# Altium PCB fm_transmitter.PcbDoc
Units mm, origin at the board's own origin, x right, y up, seen from the top; angles counter-clockwise.
Board outline 60 x 35 mm, 2 copper layers (Top Layer (Signal), Bottom Layer (GND)), stack 1.571 mm thick; 33 components, 19 nets, 80 pads, 119 vias.
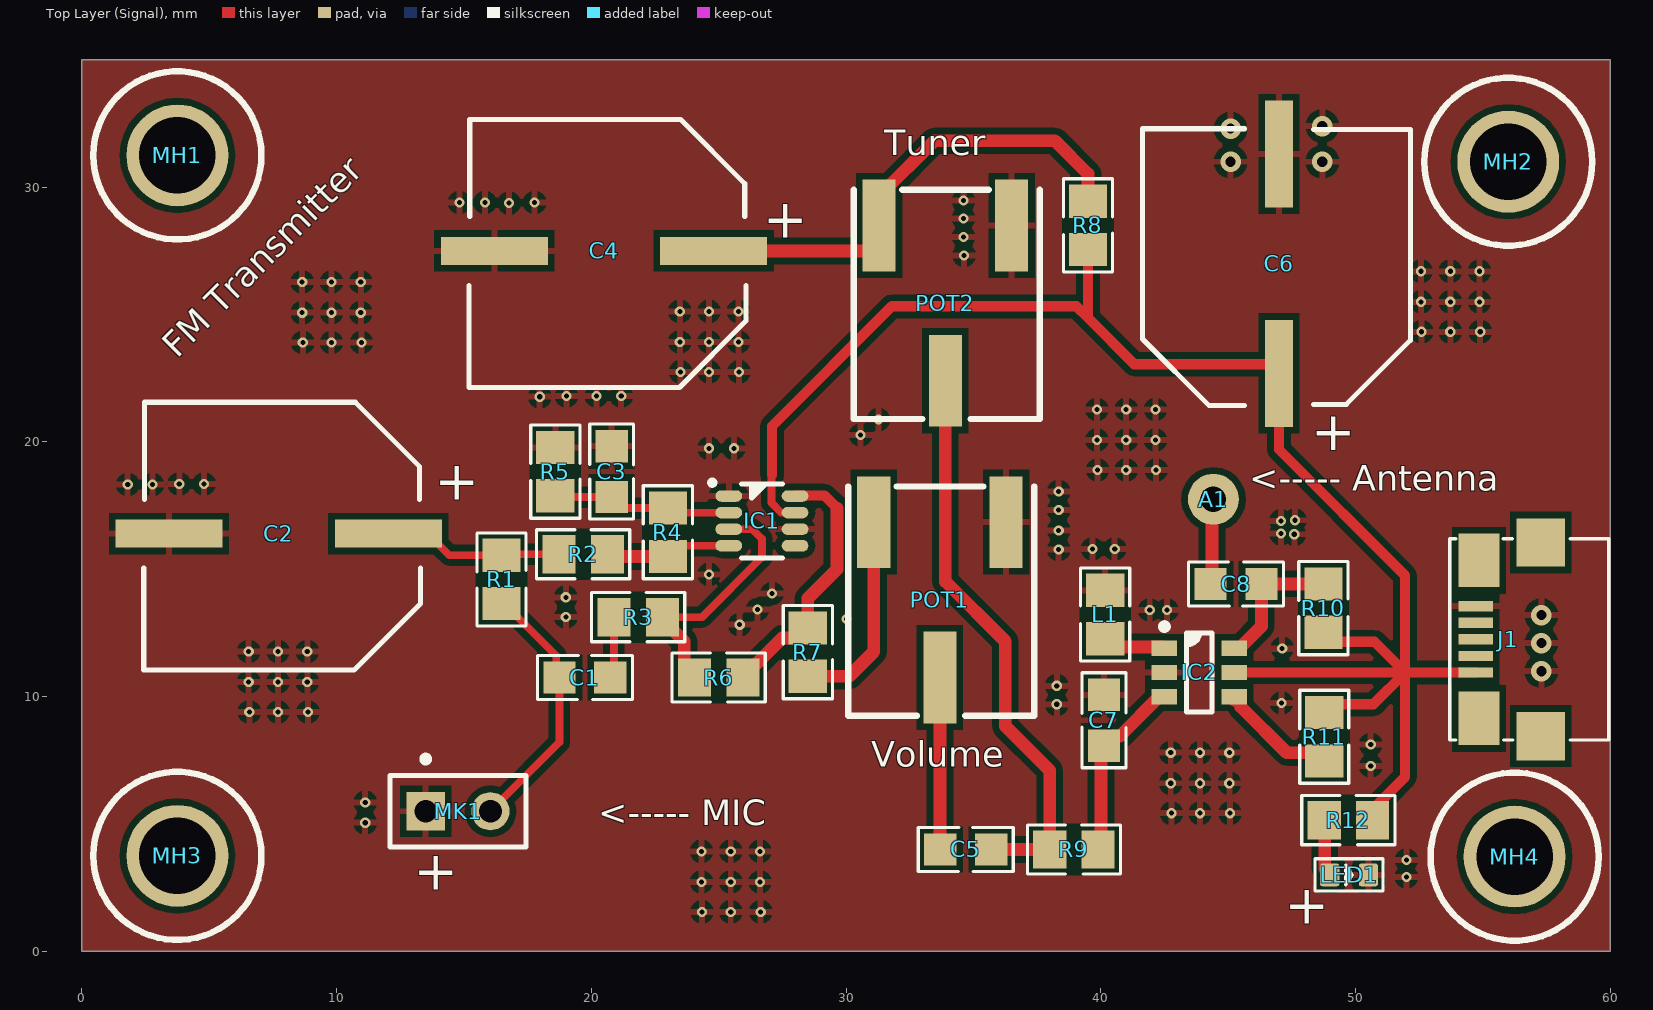
[diagram p0: Top Layer (Signal) view]
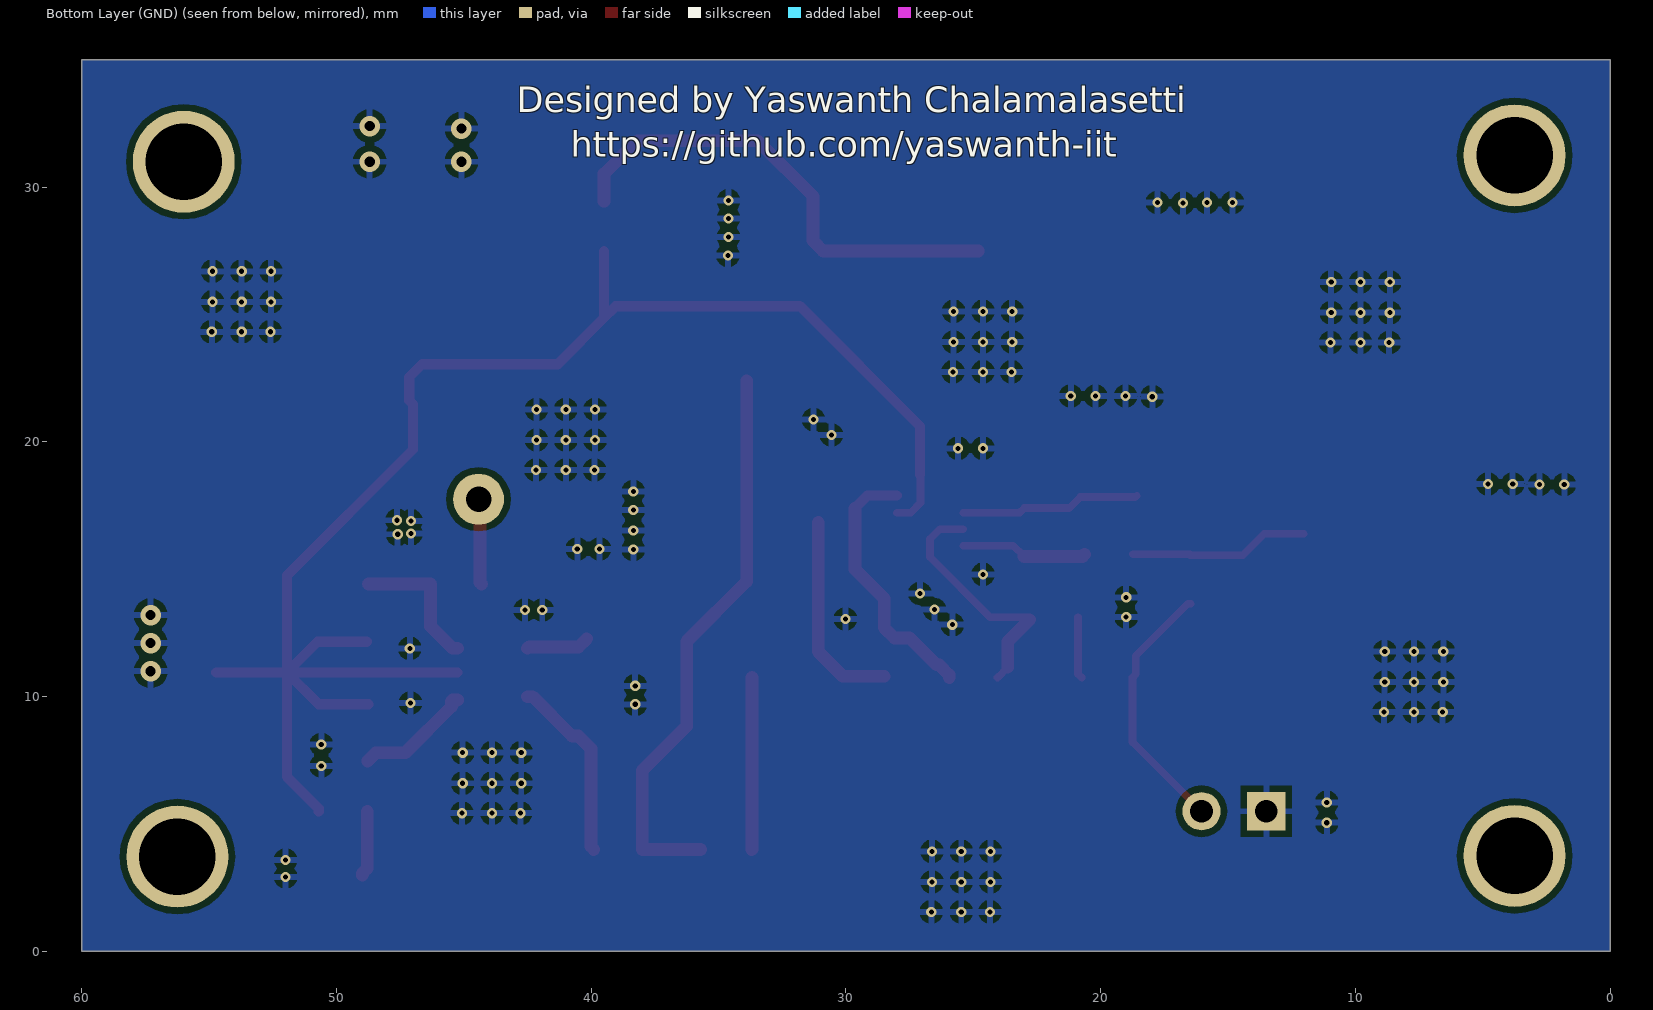
[diagram p1: Bottom Layer (GND) view, seen from below]
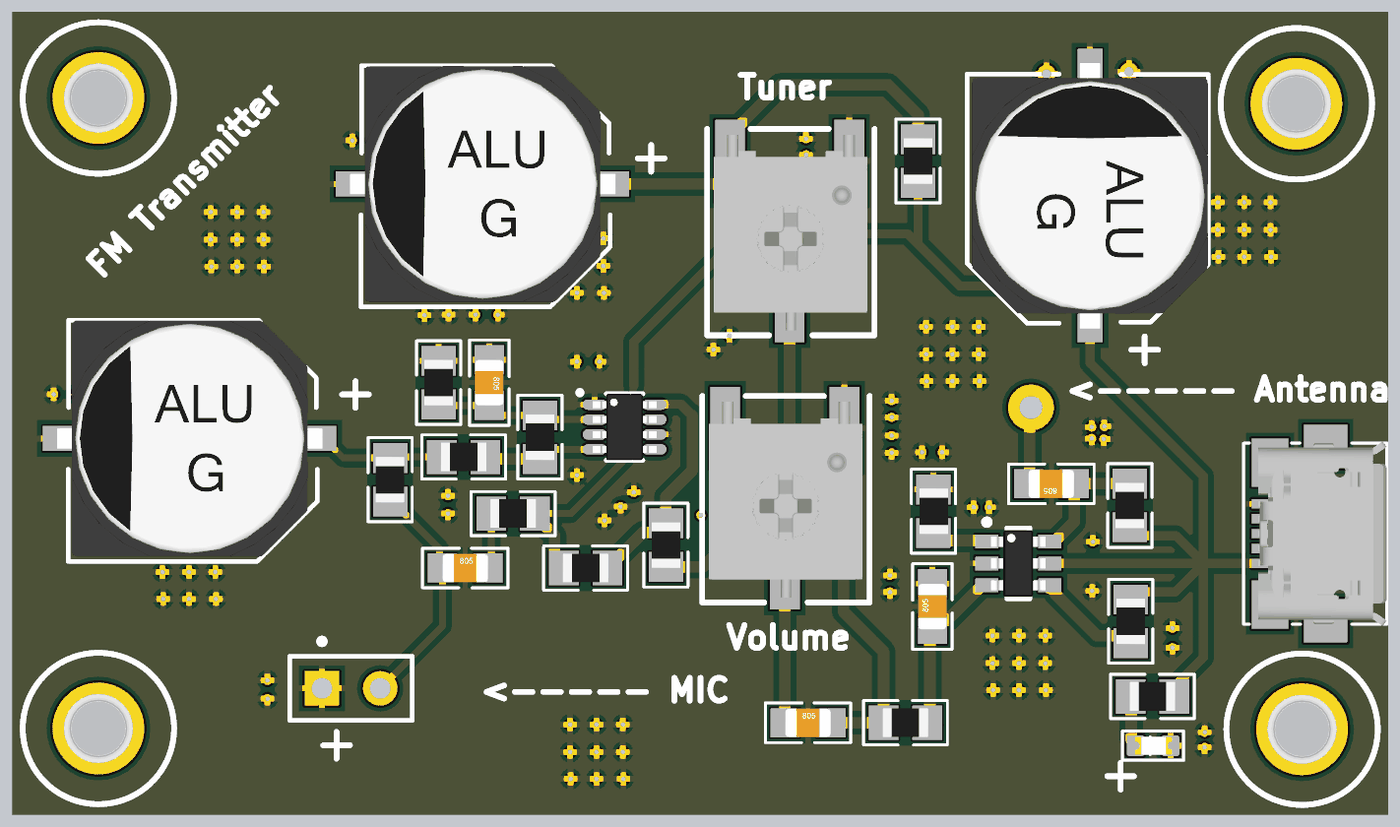
[diagram p2: 3D render of the assembled board from above, using the file's embedded part models]

## Layer stack, top to bottom
Top Solder: solder mask 0.0102, Solder Resist, Dk 3.5
Top Layer (Signal): signal copper 0.0356
Dielectric 1: core 1.5, Core-009, Dk 4.5
Bottom Layer (GND): signal copper 0.0356
Bottom Solder: solder mask 0.0102, Solder Resist, Dk 3.5

## Board outline
0,0 60,0 60,35 0,35

## Design rules (kind name [scope] priority, off if disabled: settings)
Clearance [All] p1: gap=0.254 ignorepadtopadclearanceinfootprint=TRUE except(0: Arc-Hole Track-Hole SMDPad-Hole THPad-Hole Via-Hole Fill-Hole Poly-Hole Region-Hole Text-Hole; 0.25: Arc-SMDPad Track-SMDPad)
PlaneConnect [All] p1: planeconnectstyle=Direct reliefexpansion=0.508 reliefentries=4 reliefconductorwidth=0.254 reliefairgap=0.254
PolygonConnect [All] p1: connectstyle=Relief reliefconductorwidth=0.254 reliefentries=4 polygonreliefangle="90 Angle" airgapwidth=0.254
RoutingVias [All] p1: holewidth=0.711 width=1.27 viastyle="Through Hole" minholewidth=0.711 minwidth=1.27 maxholewidth=0.711 maxwidth=1.27
SolderMaskExpansion [All] p1: expansion=0.102
Width [All] p1: maxlimit=1 minlimit=0.254 preferedwidth=0.254 minimp=50.000000 maximp=50.000000 favimp=50.000000
29 further rules are at their usual default settings.

## Components (designator, comment, footprint, x,y, rotation, side; value= is the part's Value field where it differs from the comment)
A1 "Wire Antenna" "TEST POINT_78" 44.425,17.75 r180 top
C1 "100nF" CAP_0805 19.75,10.75 r0 top
C2 "10uF" ACAP_P339_D393_H531_RAD 7.725,16.4 r180 top
C3 "47nF" CAP_0805 20.799,18.836 r270 top
C4 "10uF" ACAP_P339_D393_H531_RAD 20.5,27.499 r180 top
C5 "470nF" CAP_0805 34.7,4 r0 top
C6 "1uF" ACAP_P339_D393_H531_RAD 47,27 r90 top
C7 "2.2nF" CAP_0805 40.127,9.071 r90 top
C8 "2.2nF" CAP_0805 45.313,14.422 r180 top
IC1 "MAX4467" "TI SOT-23-8 DDF" 26.7,16.9 r270 top
IC2 "MAX2606" "MAXIM SOT-23-6" 43.875,10.95 r0 top
J1 "USB MICRO-B" CON_10118192-0001LF_SMD 56,12.25 r90 top
L1 "390nH" IND_0805 40.175,13.225 r90 top
LED1 "GREEN" LED-0603 49.75,3 r0 top
MH1 "Mounting Hole" MOUNTING 3.75,31.25 r0 top
MH2 "Mounting Hole" MOUNTING 56,31 r0 top
MH3 "Mounting Hole" MOUNTING 3.75,3.75 r0 top
MH4 "Mounting Hole" MOUNTING 56.25,3.717 r0 top
MK1 "Microphone" PIN2 13.5,5.5 r0 top
POT1 "10k ohm" POT_3361P_SMD 33.688,10.75 r180 top
POT2 "10k ohm" POT_3361P_SMD 33.9,22.4 r180 top
R1 "2K" RES_0805 16.475,14.6 r270 top
R2 "2K" RES_0805 19.681,15.591 r180 top
R3 "20K" RES_0805 21.84,13.121 r180 top
R4 "100K" RES_0805 23.009,16.454 r90 top
R5 "100K" RES_0805 18.589,18.836 r90 top
R6 "168K" RES_0805 25,10.75 r180 top
R7 "20K" RES_0805 28.5,11.75 r90 top
R8 "4.7K" RES_0805 39.5,28.5 r90 top
R9 "330" RES_0805 38.95,4 r180 top
R10 "1K" RES_0805 48.742,13.477 r270 top
R11 "1K" RES_0805 48.775,8.425 r270 top
R12 "1K" RES_0805 49.725,5.15 r180 top

## Footprints (in the part's own frame and the unit in brackets; to place one, negate y for a bottom-side part, rotate by r counter-clockwise, add the part's x,y. Pads: shape width x height; smd on the part's side, far side on the other; paste and mask are expansions set on the pad)
ACAP_P339_D393_H531_RAD [mm] "Aluminium Capacitor"
  rect 4.2x1.1 smd paste+0 mask+0.076: 1(-4.305,0) 2(4.305,0)
  silkscreen extent -5.58,-5.16 5.3,5.36, body extent -5.81,-5.15 5.79,5.15, height 10.2
CAP_0805 [mm] "Ceramic Capacitor"
  rect 1.27x1.27 smd mask+0.076: 1(-1,0) 2(1,0)
  silkscreen extent -1.86,-0.86 1.86,0.86, body extent -1,-0.62 1,0.63, height 0.78
CON_10118192-0001LF_SMD [mm] "USB2.0 MICRO"
  rect 0.4x1.35 smd: 1(-1.3,1.275) 2(-0.65,1.275) 3(0,1.275) 4(0.65,1.275) 5(1.3,1.275)
  rect 2.1x1.6 smd: 6(-3.1,1.15) 7(3.1,1.15)
  rect 1.9x1.9 smd: 8(-3.8,-1.275) 9(3.8,-1.275)
  silkscreen extent -3.95,-3.94 3.95,2.3, body extent -4.04,-3.94 4.04,1.66, height 2.81
IND_0805 [mm] "Ferrite Bead"
  rect 1.3x1.5 smd mask+0.076: 1(0.95,0) 2(-0.95,0)
  silkscreen extent -1.83,-0.97 1.83,0.97, body extent -1,-0.63 1,0.62, height 0.5
LED-0603 [mil]
  rrect25% 30x35 smd: +(-30,0) -(30,0)
  silkscreen extent -52,-25 52,25, body extent -30,-16 32,16, height 28
"MAXIM SOT-23-6" [mm] "SOT23, 6-Leads, Body 2.90x2.80mm, Pitch 0.95mm, IPC Medium Density"
  rect 1x0.6 smd: 1(-1.375,0.95) 2(-1.375,0) 3(-1.375,-0.95) 4(1.375,-0.95) 5(1.375,0) 6(1.375,0.95)
  silkscreen extent -1.5,-1.55 0.5,1.92, body extent -1.19,-1.45 1.19,1.45, height 1
MOUNTING [mm] "MH"
  round 4 hole 3: 1(0,0)
  silkscreen extent -3.3,-3.3 3.3,3.3, body extent -3,-2.75 3,2.75, height 4.24
PIN2 [mm] "Photosensitive Diode; 2 Leads"
  rect 1.5x1.5 hole 0.9: 1(0,0)
  round 1.5 hole 0.9: 2(2.54,0)
  silkscreen extent -1.4,-1.4 3.94,2.17
POT_3361P_SMD [mm] "CASE: SMD"
  rect 1.3x3.6 smd: 1(2.6,-6.1) 2(0,0) 3(-2.6,-6.1)
  silkscreen extent -3.7,-7.5 3.6,1.5, body extent -3.39,-7.25 3.31,1.29, height 5.46
RES_0805 [mm] "Resister"
  rect 1.3x1.5 smd mask+0.076: 1(0.95,0) 2(-0.95,0)
  silkscreen extent -1.83,-0.97 1.83,0.97, body extent -1,-0.63 1,0.62, height 0.5
"TEST POINT_78" [mm]
  round 2 hole 1: 1(0,0)
"TI SOT-23-8 DDF" [mm] "TSOT-23-8 Package, 0.65mm Pitch, 2.90x1.60mm Body"
  oval 0.45x1.05 smd: 1(-0.975,-1.3) 2(-0.325,-1.3) 3(0.325,-1.3) 4(0.975,-1.3) 5(0.975,1.3) 6(0.325,1.3) 7(-0.325,1.3) 8(-0.975,1.3)
  silkscreen extent -1.6,-2.05 1.45,0.8, body extent -1.45,-1.4 1.45,1.4, height 1.1

## Part data
A1: library part "TEST POINT", "0.4mm hole size Test point", Alternate Part Number-1=NA, Case/Package=TH, Manufacturer=NA, Manufacturer Part Number=NA, Supplier-1=NA, Supplier Part Number-1=NA
C1 C3 C5 C7 C8: library part CAP_0.1uF-50V-10%-0805, "0.1µF ±10% 50V Ceramic Capacitor X7R 0805 (2012 Metric)", Alternate Part Number-1=NA, Case/Package=0805, Manufacturer=Samsung, Manufacturer Part Number=CL21B104KBCNNNC, Supplier Part Number-1=0805B104K500CT, Supplier-1=SIRICOM
C2 C4 C6: library part CAP-P_10uF-400V-20%-RAD, "10µF 400V Aluminum Electrolytic Capacitors Radial, Can - SMD 10000 Hrs @ 105°C", Alternate Part Number-1=NA, Case/Package=Radial-SMD, Manufacturer=Nichicon, Manufacturer Part Number=ULV2G100MNL1GS, Supplier-1="SP ROAD", Supplier Part Number-1=ULV2G100MNL1GS
IC1: library part IC_MAX4467, ComponentLink1Description=Datasheet, ComponentLink1URL=https://datasheets.maximintegrated.com/en/ds/MAX4465-MAX4469.pdf
IC2: library part IC_MAX2606, ComponentLink1Description=Datasheet, ComponentLink1URL=https://datasheets.maximintegrated.com/en/ds/MAX2605-MAX2609.pdf
J1: library part CON_USB2.0_MICROB-SMD, "USB - micro B USB 2.0 Receptacle Connector 5 Position Surface Mount, Right Angle", Alternate Part Number-1=NA, Case/Package="USB MICRO-B SMD", Manufacturer=ICC, Manufacturer Part Number=10118192-0001LF, Supplier Part Number-1="MICRO USB", Supplier-1=SUNROM
L1: library part IND_33uH-8A-20%-SMD, "Fixed Inductors MSS1583 SMT Power 0.038Ohms 33uH", Alternate Part Number-1=NA, Case/Package=SMD, Manufacturer=Coilcraft, Manufacturer Part Number=MSS1583-333MEB, Supplier-1="COILCRAFT SAMPLE", Supplier Part Number-1=MSS1583-333MEB
LED1: library part LED-SMD-RED-DIFFUSED(0603), MPN=19-217-R6C-AL1M2VY-3T
MH1 MH2 MH3 MH4: library part MH_3.5H_6D, Alternate Part Number-1=NA, Case/Package=TH, Manufacturer=NA, Manufacturer Part Number=NA, Supplier-1=NA, Supplier Part Number-1=NA
MK1: library part Mic2, LatestRevisionDate=17-Jul-2002, LatestRevisionNote="Re-released for DXP Platform.", PackageReference=PIN2, Published=24-Mar-1999, Publisher="Altium Limited"
POT1 POT2: library part POT_10K-3361P-1-103GLF-SMD, "10 kOhms 0.5W, 1/2W Gull Wing Surface Mount Trimmer Potentiometer Cermet 1 Turn Top Adjustment", Alternate Part Number-1=NA, Case/Package=SMD, Manufacturer=Bourns, Manufacturer Part Number=3361P-1-103GLF, Supplier Part Number-1=652-3361P-1-103GLF, Supplier-1=Mouser
R1 R2: library part RES_2K-0.125W-1%-0805, "2 kOhms ±1% 0.125W, 1/8W Chip Resistor 0805 (2012 Metric) Moisture Resistant Thick Film", Alternate Part Number-1=NA, Case/Package=0805, Manufacturer="TE Connectivity", Manufacturer Part Number=RC0805FR-072KL, Supplier Part Number-1=WR08X2001FTL, Supplier-1=SIRICOM
R3 R7: library part RES_20K-0.5W-5%-0805, "20 kOhms ±5% 0.5W, 1/2W Chip Resistor 0805 (2012 Metric) Automotive AEC-Q200, Pulse Withstanding Thick Film", Alternate Part Number-1=NA, Case/Package=0805, Manufacturer=Panasonic, Manufacturer Part Number=ERJ-P06J203V, Supplier Part Number-1=WR08X2002FTL, Supplier-1=SIRICOM
R4 R5: library part RES_100K-0.125W-1%-0805, "100 kOhms ±1% 0.125W, 1/8W Chip Resistor 0805 (2012 Metric) Automotive AEC-Q200 Thick Film", Alternate Part Number-1=NA, Case/Package=0805, Manufacturer=Walsin, Manufacturer Part Number=WR08X1003FTL, Supplier-1=SIRICOM, Supplier Part Number-1=WR08X1003FTL
R6: library part RES_100K-0.125W-1%-0805, "168 kOhms ±1% 0.125W, 1/8W Chip Resistor 0805 (2012 Metric) Automotive AEC-Q200 Thick Film", Alternate Part Number-1=NA, Case/Package=0805, Manufacturer=Walsin, Manufacturer Part Number=WR08X1003FTL, Supplier-1=SIRICOM, Supplier Part Number-1=WR08X1003FTL
R8: library part RES_4.7K-0.125W-1%-0805, "4.7 kOhms ±1% 0.125W, 1/8W Chip Resistor 0805 (2012 Metric) Moisture Resistant Thick Film", Alternate Part Number-1=0805W8F4701T5E, Case/Package=0805, Manufacturer="TE Connectivity", Manufacturer Part Number=RC0805FR-074K7L, Supplier Part Number-1=WR08X4701FTL, Supplier-1=SIRICOM
R9: library part RES_3.3K-0.125W-1%-0805, "300 Ohms ±1% 0.125W, 1/8W Chip Resistor 0805 (2012 Metric) Thick Film", Alternate Part Number-1=0805W8F3301T5E, Case/Package=0805, Manufacturer=Panasonic, Manufacturer Part Number=1623214-1, Supplier Part Number-1=WR08X3301FTL, Supplier-1=SIRICOM
R10 R12: library part RES_1K-0.125W-1%-0805, "1 kOhms ±1% 0.125W, 1/8W Chip Resistor 0805 (2012 Metric) Moisture Resistant Thick Film", Alternate Part Number-1=WR08X1001FTL, Case/Package=0805, Manufacturer=Walsin, Supplier Part Number-1=RC0805JR-071KL, Manufacturer Part Number=WR08X1001FTL, Supplier-1="SP ROAD"
R11: library part RES_10K-0.125W-1%-0805, "10 kOhms ±1% 0.125W, 1/8W Chip Resistor 0805 (2012 Metric) Automotive AEC-Q200 Thick Film", Alternate Part Number-1=WR08X1002FTL, Case/Package=0805, Manufacturer=CTS, Manufacturer Part Number=WR08X1002FTL, Supplier-1=SIRICOM, Supplier Part Number-1=WR08X1002FTL

## Via types
v1: diameter 0.4, hole 0.2, Top Layer (Signal) to Bottom Layer (GND), 112 vias
v2: diameter 0.8, hole 0.4, Top Layer (Signal) to Bottom Layer (GND), 7 vias

## Nets (pads, with @x,y where several pads share a name; then routed paths per layer and width w, separated by ;. In a path a pad name is that pad's centre, name@x,y a point inside that pad or via, vN(x,y) a via of type N, cw(c..) or ccw(c..) an arc to the next point about the centre after c; other vN are vias at no path point)
GND: C2.2 C3.1 C4.2 C6.2 C7.2 IC1.1 IC1.6 IC2.2 J1.5 L1.1 LED1.- MK1.1 POT1.3 POT2.3 R5.1
  other v1: 24.35,1.55 25.475,1.55 26.65,1.55 24.325,2.725 25.475,2.725 26.625,2.725 52,2.925 52.004,3.587 24.325,3.925 25.475,3.925 26.625,3.925 11.125,5.05 42.775,5.425 43.9,5.425 45.075,5.425 11.125,5.85 42.75,6.6 43.9,6.6 45.05,6.6 50.6,7.275 42.75,7.8 43.9,7.8 45.05,7.8 50.6,8.125 6.575,9.4 7.7,9.4 8.875,9.4 38.275,9.7 47.1,9.75 38.275,10.425 6.55,10.575 7.7,10.575 8.85,10.575 6.55,11.775 7.7,11.775 8.85,11.775 47.125,11.896 25.825,12.825 30.025,13.05 19,13.125 41.925,13.4 42.6,13.4 26.525,13.425 19,13.9 27.1,14.05 24.625,14.8 38.35,15.775 39.675,15.8 40.55,15.8 47.6,16.375 47.075,16.4 38.35,16.525 47.075,16.9 47.625,16.925 38.35,17.325 38.35,18.05 1.8,18.325 2.775,18.325 3.825,18.35 4.8,18.35 39.875,18.9 41,18.9 42.175,18.9 24.625,19.75 25.6,19.75 39.85,20.075 41,20.075 42.15,20.075 30.575,20.275 31.275,20.875 39.85,21.275 41,21.275 42.15,21.275 17.975,21.775 19.025,21.8 20.2,21.8 21.175,21.8 23.5,22.75 24.625,22.75 25.8,22.75 8.675,23.9 9.8,23.9 10.975,23.9 23.475,23.925 24.625,23.925 25.775,23.925 52.6,24.325 53.725,24.325 54.9,24.325 8.65,25.075 9.8,25.075 10.95,25.075 23.475,25.125 24.625,25.125 25.775,25.125 52.575,25.5 53.725,25.5 54.875,25.5 8.65,26.275 9.8,26.275 10.95,26.275 52.575,26.7 53.725,26.7 54.875,26.7 34.637,27.323 34.612,28.048 34.612,28.773 16.775,29.375 14.825,29.4 15.825,29.4 17.775,29.4 34.612,29.473
  other v2: 57.3,11 57.3,12.1 57.3,13.2 45.1,31 48.7,31 45.1,32.3 48.7,32.4
NetA1_1: A1.1 C8.2 | length 3.4
  Top Layer (Signal) w0.5: C8.2 44.369,14.478 44.369,17.694 A1.1
NetC1_1: C1.1 MK1.2 R1.1 | length 10.3
  Top Layer (Signal) w0.3: MK1.2 18.75,8.21 C1.1 18.625,10.875 18.625,11.6 16.575,13.65 R1.1
NetC1_2: C1.2 R3.1 | length 2.4
  Top Layer (Signal) w0.3: C1.2 20.89,10.89 R3.1
NetC2_1: C2.1 R1.2 R2.1 | length 7.1
  Top Layer (Signal) w0.3: C2.1 13.58,16.4 14.43,15.55 R1.2 16.516,15.591 R2.1
NetC3_2: C3.2 IC1.2 R4.1 R5.2 | length 7.1
  Top Layer (Signal) w0.3: R5.2 18.639,17.836 C3.2 21.23,17.404 R4.1 23.188,17.225 IC1.2
NetC4_1: C4.1 POT2.1 R8.1 | length 19.1
  Top Layer (Signal) w0.5: C4.1 30.9,27.499 31.3,27.899 POT2.1 31.3,29.65 33.475,31.825 38.2,31.825 39.5,30.525 R8.1
NetC5_1: C5.1 POT1.2 | length 6.8
  Top Layer (Signal) w0.5: POT1.2 33.694,10.744 33.694,4.006 C5.1
NetC5_2: C5.2 POT2.2 R9.1 | length 22.4
  Top Layer (Signal) w0.5: POT2.2 33.9,14.525 36.25,12.175 36.25,8.85 38,7.1 R9.1 ; C5.2 R9.1
NetC6_1: C6.1 IC1.7 IC2.5 J1.1 R8.2 R10.1 R11.2 R12.2 | length 66.4
  Top Layer (Signal) w0.3: 27.1,18.7 27.075,18.675 27.075,17.616 27.466,17.225 IC1.7
  Top Layer (Signal) w0.4: 27.1,18.7 27.1,20.625 31.8,25.325 39.045,25.325 39.5,24.87 ; R8.2@39.5,27.494 39.5,24.87 ; IC2.5 51.95,10.95 ; R11.2@48.75,9.7 50.7,9.7 51.95,10.95 ; R10.1@48.817,12.152 50.748,12.152 51.95,10.95 ; R12.2@50.7,5.5 50.7,5.6 51.95,6.85 51.95,10.95 ; J1.1 51.95,10.95 ; 39.5,24.87 41.32,23.05 46.645,23.05 C6.1 47.15,22.545 47.15,21.632 47,21.482 47,19.7 51.95,14.75 51.95,10.95
NetC7_1: C7.1 IC2.3 R9.2 | length 7.3
  Top Layer (Signal) w0.5: R9.2 40.013,4.113 40.013,7.958 C7.1 40.512,8.456 40.756,8.456 42.3,10 IC2.3
NetC8_1: C8.1 IC2.6 R10.2 | length 5.5
  Top Layer (Signal) w0.5: IC2.6 45.45,11.9 46.313,12.763 C8.1 46.315,14.425 48.74,14.425 R10.2
NetIC1_3: IC1.3 R3.2 R6.1 | length 10
  Top Layer (Signal) w0.3: R3.2@22.79,13.021 R3.2 24.346,13.121 26.7,15.475 26.7,16.2 26.325,16.575 IC1.3 ; R6.1@23.65,11.15 R6.1
  Top Layer (Signal) w0.5: R3.2@22.79,13.021 23.65,12.161 R6.1@23.65,11.15
NetIC1_4: IC1.4 R2.2 R4.2 | length 5
  Top Layer (Signal) w0.3: R4.2 23.429,15.925 IC1.4
  Top Layer (Signal) w0.5: R2.2 20.717,15.504 R4.2
NetIC1_8: IC1.8 R6.2 R7.1 | length 10.4
  Top Layer (Signal) w0.4: IC1.8@28,17.9 29.15,17.9 29.65,17.4
  Top Layer (Signal) w0.5: R6.2 25.95,10.85 26.35,11.25 26.45,11.25 27.5,12.3 28.1,12.3 R7.1 28.5,13.85 29.65,15 29.65,17.4
NetIC2_1: IC2.1 L1.2 | length 2.5
  Top Layer (Signal) w0.5: L1.2 40.5,11.95 42.45,11.95 IC2.1
NetIC2_4: IC2.4 R11.1 | length 4.6
  Top Layer (Signal) w0.5: IC2.4@45.239,9.866 45.439,9.866 45.489,9.816 45.489,9.616 47.305,7.8 48.45,7.8 R11.1
NetLED1_+: LED1.+ R12.1 | length 2.6
  Top Layer (Signal) w0.5: R12.1@48.8,5.5 48.8,3.252 48.988,3.063 LED1.+
NetPOT1_1: POT1.1 R7.2 | length 8.1
  Top Layer (Signal) w0.5: R7.2 30.125,10.8 31.088,11.763 POT1.1
pads on no net: IC1.5 J1.2 J1.3 J1.4 J1.6 J1.7 J1.8 J1.9 MH1.1 MH2.1 MH3.1 MH4.1

## Polygon pours and split planes (outlines as drawn)
GND on Bottom Layer (GND) "Bottom Layer-GND" (solid, pour order 8): 0,35 60,35 60,0 0,0
GND on Top Layer (Signal) "Top Layer-GND" (solid, pour order 4): 0,35 0,0 60,0 60,35

## Silkscreen, mask and mechanical layers (free items; w line width, h text height)
Top Overlay:
  text "Tuner" at 31.5,31.25 h1
  text "+" at 26.75,28.025 h1.52
  text "FM Transmitter" at 3.75,23.25 h1 r45
  text "+" at 48.275,19.675 h1.52
  text "<----- Antenna" at 45.825,18.075 h1
  text "+" at 13.85,17.725 h1.52
  text "Volume" at 31,7.25 h1
  text "<----- MIC" at 20.275,4.95 h1
  text "+" at 13.025,2.425 h1.52
  text "+" at 47.225,1.075 h1.52
Bottom Overlay:
  text "Designed by Yaswanth Chalamalasetti" at 42.925,32.95 h1
  text "https://github.com/yaswanth-iit" at 40.8,31.2 h1
Drill Drawing:
  circle w0.254: c1.59,-22.058 r0.702
  lines w0.025: 69.132,-0.279 72.584,3.173 ; 69.132,1.245 71.06,3.173 ; 69.132,2.769 69.536,3.173 ; 70.568,-0.367 74.108,3.173 ; 72.092,-0.367 75.154,2.695 ; 73.616,-0.367 75.154,1.171
  lines w0.254: -6.458,1.52 -5.95,-0.004 ; -6.458,33.472 -5.95,34.996 ; -6.204,-0.004 -5.696,-0.004 ; -6.204,34.996 -5.696,34.996 ; -5.95,12.392 -5.95,-0.004 ; -5.95,22.6 -5.95,34.996 ; -5.442,1.52 -5.95,-0.004 ; -5.442,33.472 -5.95,34.996 ; -5.321,35 -0.321,35 ; -5.296,0.021 -0.296,0.021 ; 0.889,-31.882 1.239,-31.882 1.59,-32.233 1.941,-31.882 2.292,-31.882 1.941,-31.531 2.292,-31.18 1.941,-31.18 1.59,-30.829 1.239,-31.18 0.889,-31.18 1.239,-31.531 0.889,-31.882 ; 0.889,-29.075 2.292,-29.075 2.292,-27.672 0.889,-27.672 0.889,-29.075 ; 0.889,-24.514 2.292,-24.514 1.59,-25.917 0.889,-24.514 ; 0.889,-19.602 1.59,-19.252 2.292,-19.602 1.941,-18.901 2.292,-18.199 1.59,-18.55 0.889,-18.199 1.239,-18.901 0.889,-19.602
  lines w0.381: -0.384,-33.18 98.701,-33.18 ; -0.384,-17.392 98.701,-17.392 ; 7.731,-36.337 7.731,-14.235 ; 15.064,-36.337 15.064,-14.235 ; 29.727,-36.337 29.727,-14.235 ; 36.019,-36.337 36.019,-14.235 ; 45.178,-36.337 45.178,-14.235 ; 69.132,10.017 75.73,10.017 91.701,10.017 103.394,10.017 113.008,10.017 121.878,10.017 129.346,10.017 ; 69.132,13.065 75.73,13.065 91.701,13.065 103.394,13.065 113.008,13.065 121.878,13.065 129.346,13.065 ; 69.132,16.113 75.73,16.113 91.701,16.113 103.394,16.113 113.008,16.113 121.878,16.113 129.346,16.113 ; 69.132,19.161 75.73,19.161 91.701,19.161 103.394,19.161 113.008,19.161 121.878,19.161 129.346,19.161 ; 69.132,22.209 75.73,22.209 91.701,22.209 103.394,22.209 113.008,22.209 121.878,22.209 129.346,22.209 ; 69.132,25.257 75.73,25.257 91.701,25.257 103.394,25.257 113.008,25.257 121.878,25.257 129.346,25.257 ; 69.132,28.305 129.346,28.305 ; 71.829,-36.337 71.829,-14.235 ; 75.73,31.353 75.73,6.969 ; 79.336,-36.337 79.336,-14.235 ; 89.14,-36.337 89.14,-14.235 ; 91.701,31.353 91.701,6.969 ; 103.394,31.353 103.394,6.969 ; 113.008,31.353 113.008,6.969 ; 121.878,31.353 121.878,6.969 ; 75.73,6.969 91.701,6.969 ; 75.73,6.969 69.132,6.969 69.132,31.353 129.346,31.353 129.346,6.969 121.878,6.969 ; 91.701,6.969 103.394,6.969 ; 103.394,6.969 113.008,6.969 ; 113.008,6.969 121.878,6.969 ; -0.384,-36.337 98.701,-36.337 98.701,-14.235 -0.384,-14.235 -0.384,-36.337 ; 69.132,-0.353 69.132,3.159 75.154,3.159 75.154,-0.353 69.132,-0.353
  text "Fabrication Notes" at 190.1,64.3 h2
  text "PCB Dimentions: 60 mm x 35 mm" at 1.075,47 h2
  text "PCB Layer Stack Table" at 79.275,33.775 h2
  text "Layer" at 70.656,29.067 h1.52
  text "Name" at 77.254,29.067 h1.52
  text "Material" at 93.225,29.067 h1.52
  text "Thickness" at 104.918,29.067 h1.52
  text "Constant" at 114.532,29.067 h1.52
  text "Gerber" at 123.402,29.067 h1.52
  text "Top Overlay" at 77.254,26.019 h1.52
  text "GTO" at 123.402,26.019 h1.52
  text "Top Solder" at 77.254,22.971 h1.52
  text "Solder Resist" at 93.225,22.971 h1.52
  text "0.010mm" at 104.918,22.971 h1.52
  text "3.5" at 114.532,22.971 h1.52
  text "GTS" at 123.402,22.971 h1.52
  text "1" at 70.656,19.923 h1.52
  text "Top Layer (Signal)" at 77.254,19.923 h1.52
  text "Copper" at 93.225,19.923 h1.52
  text "0.036mm" at 104.918,19.923 h1.52
  text "GTL" at 123.402,19.923 h1.52
  text "Dielectric 1" at 77.254,16.875 h1.52
  text "Core-009" at 93.225,16.875 h1.52
  text "1.500mm" at 104.918,16.875 h1.52
  text "4.5" at 114.532,16.875 h1.52
  text "2" at 70.656,13.827 h1.52
  text "Bottom Layer (GND)" at 77.254,13.827 h1.52
  text "Copper" at 93.225,13.827 h1.52
  text "0.036mm" at 104.918,13.827 h1.52
  text "GBL" at 123.402,13.827 h1.52
  text "35 (mm)" at -5.036,12.646 h1.52 r90
  text "Bottom Solder" at 77.254,10.779 h1.52
  text "Solder Resist" at 93.225,10.779 h1.52
  text "0.010mm" at 104.918,10.779 h1.52
  text "3.5" at 114.532,10.779 h1.52
  text "GBS" at 123.402,10.779 h1.52
  text "Bottom Overlay" at 77.254,7.731 h1.52
  text "GBO" at 123.402,7.731 h1.52
  text "Total board thickness:" at 70.656,4.683 h1.52
  text "1.591mm" at 104.918,4.683 h1.52
  text "Drill Table" at 40.15,-10.7 h2
  text "Symbol" at 1.511,-16.445 h1.83
  text "Count" at 8.678,-16.445 h1.83
  text "Hole Size" at 16.011,-16.445 h1.83
  text "Plated" at 30.674,-16.445 h1.83
  text "Hole Type" at 36.967,-16.445 h1.83
  text "Drill Layer Pair" at 46.125,-16.445 h1.83
  text "Via/Pad" at 72.776,-16.445 h1.83
  text "Pad Shape" at 80.283,-16.445 h1.83
  text "Template" at 90.088,-16.445 h1.83
  text "1" at 8.678,-19.602 h1.52
  text "1.000mm (39.37mil)" at 16.011,-19.602 h1.52
  text "PTH" at 30.674,-19.602 h1.52
  text "Round" at 36.967,-19.602 h1.52
  text "Top Layer (Signal) - Bottom Layer (GND)" at 46.125,-19.602 h1.52
  text "Pad" at 72.776,-19.602 h1.52
  text "Rounded" at 80.283,-19.602 h1.52
  text "c200h100" at 90.088,-19.602 h1.52
  text "2" at 8.678,-22.76 h1.52
  text "0.900mm (35.43mil)" at 16.011,-22.76 h1.52
  text "PTH" at 30.674,-22.76 h1.52
  text "Round" at 36.967,-22.76 h1.52
  text "Top Layer (Signal) - Bottom Layer (GND)" at 46.125,-22.76 h1.52
  text "Pad" at 72.776,-22.76 h1.52
  text "(Mixed)" at 80.283,-22.76 h1.52
  text "(Mixed)" at 90.088,-22.76 h1.52
  text "4" at 8.678,-25.917 h1.52
  text "3.000mm (118.11mil)" at 16.011,-25.917 h1.52
  text "PTH" at 30.674,-25.917 h1.52
  text "Round" at 36.967,-25.917 h1.52
  text "Top Layer (Signal) - Bottom Layer (GND)" at 46.125,-25.917 h1.52
  text "Pad" at 72.776,-25.917 h1.52
  text "Rounded" at 80.283,-25.917 h1.52
  text "c400h300" at 90.088,-25.917 h1.52
  text "7" at 8.678,-29.075 h1.52
  text "0.400mm (15.75mil)" at 16.011,-29.075 h1.52
  text "PTH" at 30.674,-29.075 h1.52
  text "Round" at 36.967,-29.075 h1.52
  text "Top Layer (Signal) - Bottom Layer (GND)" at 46.125,-29.075 h1.52
  text "Via" at 72.776,-29.075 h1.52
  text "Rounded" at 80.283,-29.075 h1.52
  text "v80h40" at 90.088,-29.075 h1.52
  text "112" at 8.678,-32.233 h1.52
  text "0.200mm (7.87mil)" at 16.011,-32.233 h1.52
  text "PTH" at 30.674,-32.233 h1.52
  text "Round" at 36.967,-32.233 h1.52
  text "Top Layer (Signal) - Bottom Layer (GND)" at 46.125,-32.233 h1.52
  text "Via" at 72.776,-32.233 h1.52
  text "Rounded" at 80.283,-32.233 h1.52
  text "v40h20" at 90.088,-32.233 h1.52
  text "126 Total" at 8.678,-35.39 h1.52
  text "1.  FABRICATE PER ANSI/IPC-A-600,IPC-QE-605, IPC-4101,IPC-4552 AND IPC-SM-840 SPECIFICATIONS.  / 2.  MATERIAL: BASE MATERIAL LAMINATED EPOXY GLASS NEMA GRADE FR-4, NOM .062\", COLOR NATURAL.   /     NOM 1 OZ COPPER WEIGHT.   THICKNESS .070\" MAX AFTER PLATING AND FINISHING.   /     PREFER ROHS COMPLIANT PER IPC-4101 SLASH SHEETS #26 OR #83 OR #98 WITH  /     MINIMUM TG 135 DEGREE C OR HIGHER, TD 300 DEGREE C OR HIGHER AND FLAME RATED UL 94V-0. / 3.  ALL DIMENTIONS ARE IN INCHES UNLESS OTHERWISE SPECIFIED / 4.  DIMENSIONAL TOLERANCES ARE: .XX=+/- .01; .XXX=+/-.005; / 5.  TOTAL THICHNESS OF PCB AFTER PLATING SHALL BE 0.0618\" +/- 0.005\" / 6.  SOLDERMASK BOTH SIDES OF BOARD OVER BARE COPPER WITH MATERIAL PER ANSI/IPC-SM-840,  /     COLOR SHALL BE GREEN AND SOLVENT FREE / 7.  APPLY SOLDER PLATING WITH HOT-AIR LEVELING TO EXPOSED COPPER BOTH SIDES.   /     LEAD-FREE SOLDER PREFERRED; LEADED SOLDER ACCEPTABLE. / 8.  APPLY SILKSCREEN TO TOP SIDE OF BOARD USING NON-CONDUCTIVE WHITE EPOXY INK. NO INK SHALL  /     BE ON EXPOSED PADS / 9.  SEE SEPARATE DRILL FILE FOR HOLE LOCATIONS.   / 10.  HOLE LOCATIONS SPECIFIED IN SEPARATE DRILL FILE TAKE PRECEDENCE OVER THIS DWG AND ARTWORK.  /      CONTACT IIT BHUBANESWAR TO RESOLVE DIMENSION CONFLICTS BETWEEN DWG AND ARTWORK. /      NO ALTERATIONS TO GERBER FLES WITHOUT PRIOR CONSENT FROM IIT BHUBANESWAR / 11.  HOLE SIZES ARE SPECIFIED AS FINAL DIMENSIONS AFTER PLATING AND FINISHING.   /      UNLESS OTHERWISE SPECIFIED ALL HOLES TO BE PLATED.  / 12.  VENDOR TO PLATE HOLES AND EXPOSED PADS. /      VENDOR TO SPECIFY TYPE OF PLATING MATERIAL TO BE USED WHEN ACCEPTING ORDER. / 13.  IT IS VENDOR'S RESPONSIBILITY TO SELECT THE BASE MATERIAL TO YIELD THE SPECIFIED IMPEDENCE  /      CHARACTERISTICS TO WITHIN +/-10% / 14.  ALL HOLES SHALL BE LOCATED WITHIN 0.003\" DIAMETER OF TRUE POSITION OR OTHER TRUE POSITION / 15.  WARP OR TWIST OF BOARD SHALL NOT EXCEED 0.01 INCH PER INCH / 16.  REMOVE ALL BURRS AND BREAK SHARP EDGES 0.015\" MAX / 17.  PLATED THRU HOLES & EXPOSED PADS SHALL BE TIN/LEAD PLATED 0.0003\" TO 0.0005\" THICK / 18.  ONLY VENDOR IDENTIFICATION MARK & ORDER NUMBER CAN BE ADDED ONLY AT THE SPECIFIED LOCATION  /      (UNDER THE IC). AFTER ASSEMBLY IT SHOULD NOT APPEAR OUTSIDE / 19.  MANUFACTURER SHOULD NOT ADD ANY OTHER DATA EXCEPT ABOVE MENTIONED LIKE NAME, LOGO, DATE CODE,  /      UL LISTING OR ANY OTHER MARKING TO ANY VISIBLE LAYER / 20.  AFTER ASSEMBLY TRIM SOLDER FILLETS AND COMPONENT LEADS TO 0.06\" (MAX)  /      BEYOND BOARD SURFACE ON BOTTOM SIDE. / 21.  BOARDS MUST PASS VISUAL INSPECTION PER IPC-A-600 CLASS 2 / 22.  FINISHED BOARD MUST MEET UL94V-0 RATING AND ROHS COMPLIANCE / 23.  DOCUMENTATION THAT MUST BE DELIVERED WITH BOARDS: /         - CROSS SECTION REPORT (SPACING BETWEEN COPPER LAYERS AND COPPER THICHNESS) /         - ELECTRICAL TEST CERTIFICATION OF COMPILANCE (ACC. TO IPC-ET-652 CLASS 2) /         - CERTIFICATION OF COMPILANCE (BOARD HAS BEEN MANUFACTURED TO DRAWING REQUIREMENTS) /         - ROHS CERTIFICATION OF COMPILANCE" at 135.425,-43.3 h1.52

## Dimensions
0,35 to 60,35 on Drill Drawing